# Altium PCB Joysticks.PcbDoc
Units mm, origin at the board's own origin, x right, y up, seen from the top; angles counter-clockwise.
Board outline 99.99 x 60.01 mm, 2 copper layers (Top Layer, Bottom Layer); 9 components, 26 nets, 62 pads, 0 vias.
Unrouted connection lines stored in the file: 7.
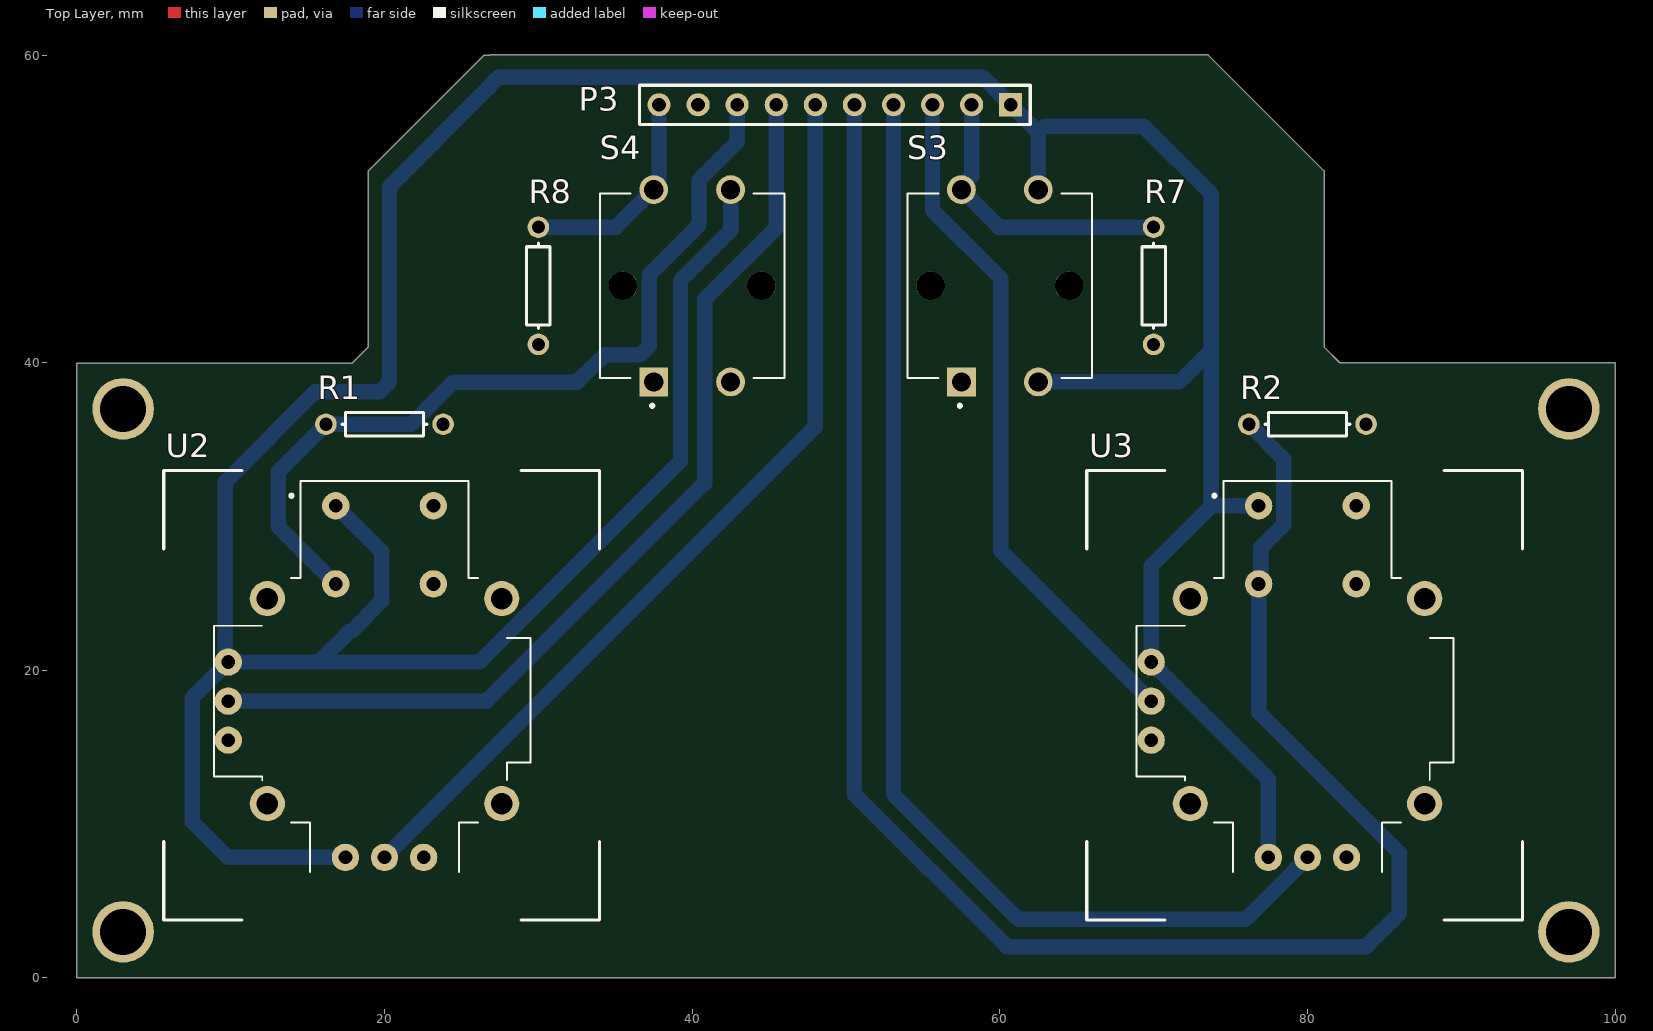
[diagram p0: Top Layer view]
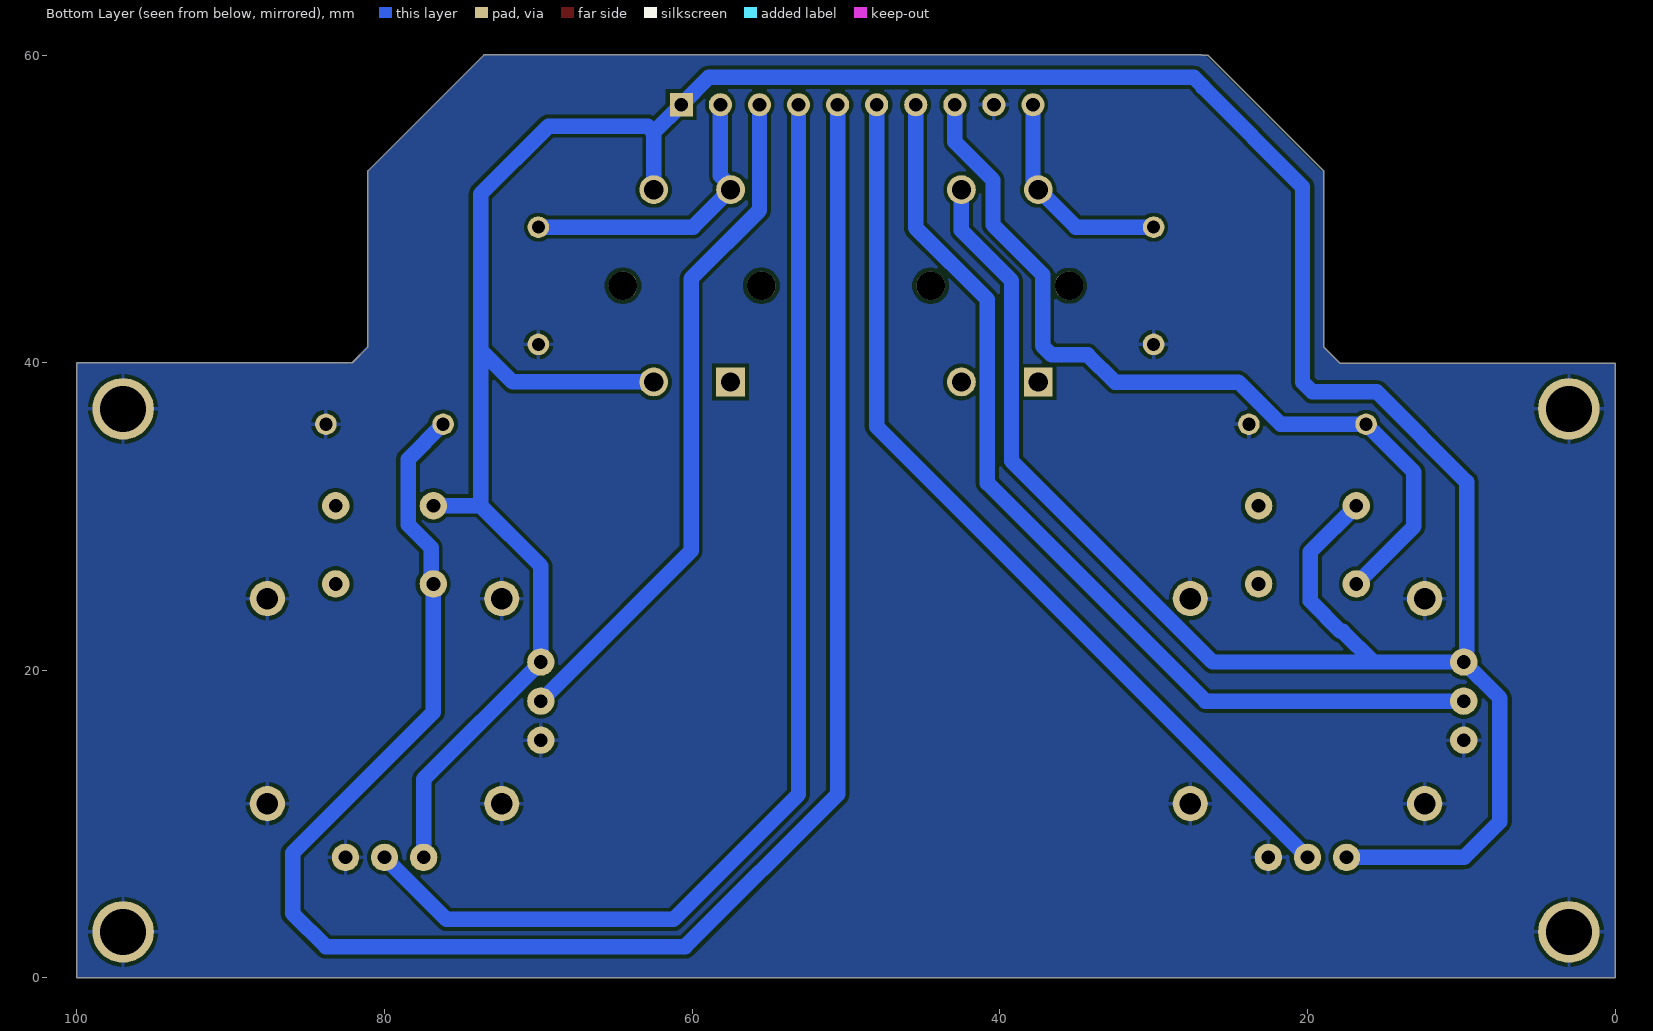
[diagram p1: Bottom Layer view, seen from below]

## Layer stack, top to bottom
Top Solder: solder mask 0.0102, Solder Resist, Dk 3.5
Top Layer: signal copper 0.0356
Dielectric 1: dielectric 0.32, FR-4, Dk 4.8
Bottom Layer: signal copper 0.0356
Bottom Solder: solder mask 0.0102, Solder Resist, Dk 3.5

## Board outline
0.005,0.005 0.005,39.978 17.907,39.978 18.928,40.999 18.928,52.45 26.467,59.989 26.844,59.989 26.866,60.011 73.538,60.011 81.077,52.472 81.077,41.021 82.098,40 100,40 100,0

## Design rules (kind name [scope] priority, off if disabled: settings)
Clearance [All] p1: gap=0.254 ignorepadtopadclearanceinfootprint=FALSE except(0: Arc-Hole Track-Hole SMDPad-Hole THPad-Hole Via-Hole Fill-Hole Poly-Hole Region-Hole Text-Hole)
Height [All] p1: minheight=0 maxheight=50 prefheight=12.7
PolygonConnect [All] p1: connectstyle=Relief reliefconductorwidth=0.254 reliefentries=4 polygonreliefangle="90 Angle" airgapwidth=0.254
RoutingLayers [All] p1: top layer_v5=FALSE bottom layer_v5=TRUE
RoutingVias [All] p1: holewidth=0.711 width=1.27 viastyle="Through Hole" minholewidth=0.711 minwidth=1.27 maxholewidth=0.711 maxwidth=1.27
SolderMaskExpansion [All] p1: expansion=0.102 istentingtop=FALSE
Width [All] p1: maxlimit=1 minlimit=0.4 preferedwidth=0.6
28 further rules are at their usual default settings.

## Components (designator, comment, footprint, x,y, rotation, side; value= is the part's Value field where it differs from the comment)
P3 "Header 10" HDR1X10 60.706,56.769 r180 top
R1 "Res1" AXIAL-0.3 20,36 r180 top value=1K
R2 "Res1" AXIAL-0.3 80,36 r180 top value=1K
R7 "Res1" AXIAL-0.3 70,45 r90 top value=1K
R8 "Res1" AXIAL-0.3 30,45 r90 top value=1K
S3 "Right Button" SW_B3F-4055 60,45 r90 top
S4 "Left Button" SW_B3F-4055 40,45 r90 top
U2 "Left Joystick" XDCR_COM-09032 20,18 r0 top
U3 "Right Joystick" XDCR_COM-09032 80,18 r0 top

## Footprints (in the part's own frame and the unit in brackets; to place one, negate y for a bottom-side part, rotate by r counter-clockwise, add the part's x,y. Pads: shape width x height; smd on the part's side, far side on the other; paste and mask are expansions set on the pad)
AXIAL-0.3 [mm] "Axial Device, Thru-Hole; 2 Leads; 0.3 in Pin Spacing"
  round 1.4 hole 0.85: 1(-3.81,0) 2(3.81,0)
  silkscreen extent -2.77,-0.76 2.77,0.76
HDR1X10 [mm] "Connector; Header; 10 Position"
  rect 1.5x1.5 hole 0.9: 1(0,0)
  round 1.5 hole 0.9: 2(2.54,0) 3(5.08,0) 4(7.62,0) 5(10.16,0) 6(12.7,0) 7(15.24,0) 8(17.78,0) 9(20.32,0) 10(22.86,0)
  silkscreen extent -1.27,-1.27 24.13,1.27
SW_B3F-4055 [mm]
  rect 1.875x1.875 hole 1.25: 1(-6.25,2.5)
  round 1.875 hole 1.25: 2(6.25,2.5) 3(-6.25,-2.5) 4(6.25,-2.5)
  round 1.85 hole 1.85 unplated: ""(0,4.5) ""(0,-4.5)
  silkscreen extent -7.9,-6 6,6, body extent -6.88,-6 6.88,6, height 7.51
XDCR_COM-09032 [mil]
  round 70 hole 35.43: B1A(-125,500) B1B(125,500) B2A(-125,300) B2B(125,300)
  round 70 hole 35: H1(-100,-400) H2(0,-400) H3(100,-400) V1(-400,100) V2(-400,0) V3(-400,-100)
  round 90 hole 55: S1(-300,262.5) S2(-300,-262.5) S3(300,-262.5) S4(300,262.5)
  silkscreen extent -565,-560 550,590, body extent -530,-528 520,559, height 1190

## Part data
P3: "Header, 10-Pin", LatestRevisionDate=17-Jul-2002, LatestRevisionNote="Re-released for DXP Platform.", Publisher="Altium Limited"
R1 R2 R7 R8: "Resistor", LatestRevisionDate=17-Jul-2002, LatestRevisionNote="Re-released for DXP Platform.", PackageDescription="Axial Device, Thru-Hole; 2 Leads; 0.3 in Pin Spacing", PackageReference=AXIAL-0.3, Published=8-Jun-2000, Publisher="Altium Limited"
S3 S4: library part B3F-4055, Package=None, Availability=Unavailable, MP=B3F-4055, Price=None
U2 U3: library part COM-09032, "Thumb Joystick", Package=None, Availability=Unavailable, MP=COM-09032, Price=None

## Free pads (board coordinates)
  round 4 hole 3: 16(3,3) 16(3,37) 16(97,3) 16(97,37)

## Nets (pads, with @x,y where several pads share a name; then routed paths per layer and width w, separated by ;. In a path a pad name is that pad's centre, name@x,y a point inside that pad or via, vN(x,y) a via of type N, cw(c..) or ccw(c..) an arc to the next point about the centre after c; other vN are vias at no path point)
+3.3: 
+5: P3.1 S3.3 S3.4 S4.3 S4.4 U2.B1A U2.H1 U2.V1 U3.B1A U3.H1 U3.V1 | length 253.8
  Bottom Layer w1: U2.B1A 19.812,27.713 19.812,24.51 17.842,22.54 17.714,22.54 15.714,20.54 ; U2.H1 9.813,7.84 7.493,10.16 7.493,18.193 U2.V1 ; S4.4 42.5,48.596 39.243,45.339 39.243,33.608 26.175,20.54 15.714,20.54 ; S3.3 71.672,38.75 73.753,40.831 ; S3.4 62.5,54.975 ; U3.B1A 73.753,30.7 ; U3.H1 77.46,12.92 U3.V1 69.84,26.787 73.753,30.7 ; U2.V1 9.691,20.689 9.691,21.239 9.652,21.278 9.652,32.258 15.494,38.1 19.685,38.1 20.32,38.735 20.32,51.435 26.797,57.912 26.797,57.961 27.383,58.547 58.928,58.547 P3.1 62.5,54.975 ; U2.V1 15.714,20.54 ; 62.5,54.975 62.897,55.372 69.342,55.372 73.753,50.961 73.753,40.831 ; 73.753,30.7 73.753,40.831
GND: P3.9 pad.16 R1.1 R2.1 R7.1 R8.1 U2.H3 U2.S1 U2.S2 U2.S3 U2.S4 U2.V3 U3.H3 U3.S1 U3.S2 U3.S3 U3.S4 U3.V3 | length 0.1
  Bottom Layer w1: R8.1@29.923,41.113 R8.1
NetC3_1: 
NetJ1_2: 
NetJ1_3: 
NetP1_4: 
NetP1_5: 
NetP1_6: 
NetP1_7: 
NetP2_3: P3.3 U3.V2 | length 44.7
  Bottom Layer w1: P3.3 55.626,49.911 60.071,45.466 60.071,27.769 U3.V2
NetP2_4: P3.4 U3.H2 | length 76.8
  Bottom Layer w1: P3.4 53.086,11.938 61.214,3.81 75.97,3.81 U3.H2
NetP2_5: P3.5 R2.2 U3.B2A | length 122.5
  Bottom Layer w1: P3.5 50.546,11.938 60.452,2.032 83.82,2.032 85.979,4.191 85.979,8.128 76.825,17.282 U3.B2A 76.974,25.769 76.974,27.979 78.468,29.474 78.468,33.722 R2.2
NetP2_6: P3.6 U2.H2 | length 60.5
  Bottom Layer w1: U2.H2 48.006,35.846 P3.6
NetP2_7: P3.7 U2.V2 | length 63.4
  Bottom Layer w1: U2.V2 26.636,18 40.808,32.172 40.808,44.11 45.466,48.768 P3.7
NetP2_8: P3.8 R1.2 U2.B2A | length 54.4
  Bottom Layer w1: U2.B2A 13.081,29.364 13.081,32.891 R1.2 21.754,36 24.489,38.735 32.512,38.735 34.29,40.513 36.625,40.513 37.211,41.099 37.211,45.72 40.445,48.954 40.445,51.875 42.926,54.356 P3.8
NetP3_2: P3.2 R7.2 S3.1 S3.2 | length 19.3
  Bottom Layer w1: P3.2 58.166,52.153 57.5,51.487 S3.2 59.94,48.81 R7.2
NetP3_10: P3.10 R8.2 S4.1 S4.2 | length 14.2
  Bottom Layer w1: R8.2 35.06,48.81 S4.2 37.5,51.487 37.846,51.833 P3.10
NetR3_2: 
NetR4_2: 
NetR5_2: 
NetR6_2: 
NetU1_30: 
NetU1_31: 
XTAL1: 
XTAL2: 
pads on no net: S3. S4. U2.B1B U2.B2B U3.B1B U3.B2B

## Polygon pours and split planes (outlines as drawn)
GND on Bottom Layer "GND_L02_P000" (solid, pour order 0): 0.005,39.978 17.907,39.978 18.928,40.999 18.928,52.45 19.116,52.45 26.678,60.011 73.538,60.011 81.077,52.472 81.077,41.021 81.153,41.021 82.296,39.878 82.418,40 100,40 100,0 0,0 0,39.973

## Silkscreen, mask and mechanical layers (free items; w line width, h text height)
Mechanical 1:
  lines w0.01: 0,0 100,0 100,40 82.098,40 81.077,41.021 81.077,52.472 73.538,60.011 73.161,60.011 26.866,60.011 ; 0.005,0.005 0.005,39.978 17.907,39.978 18.928,40.999 18.928,52.45 26.467,59.989 26.844,59.989